# Altium PCB ApDet.PcbDoc
Units mm, origin at the board's own origin, x right, y up, seen from the top; angles counter-clockwise.
Board outline 58 x 58 mm, 2 copper layers (Top Layer, Bottom Layer); 24 components, 31 nets, 196 pads, 34 vias.
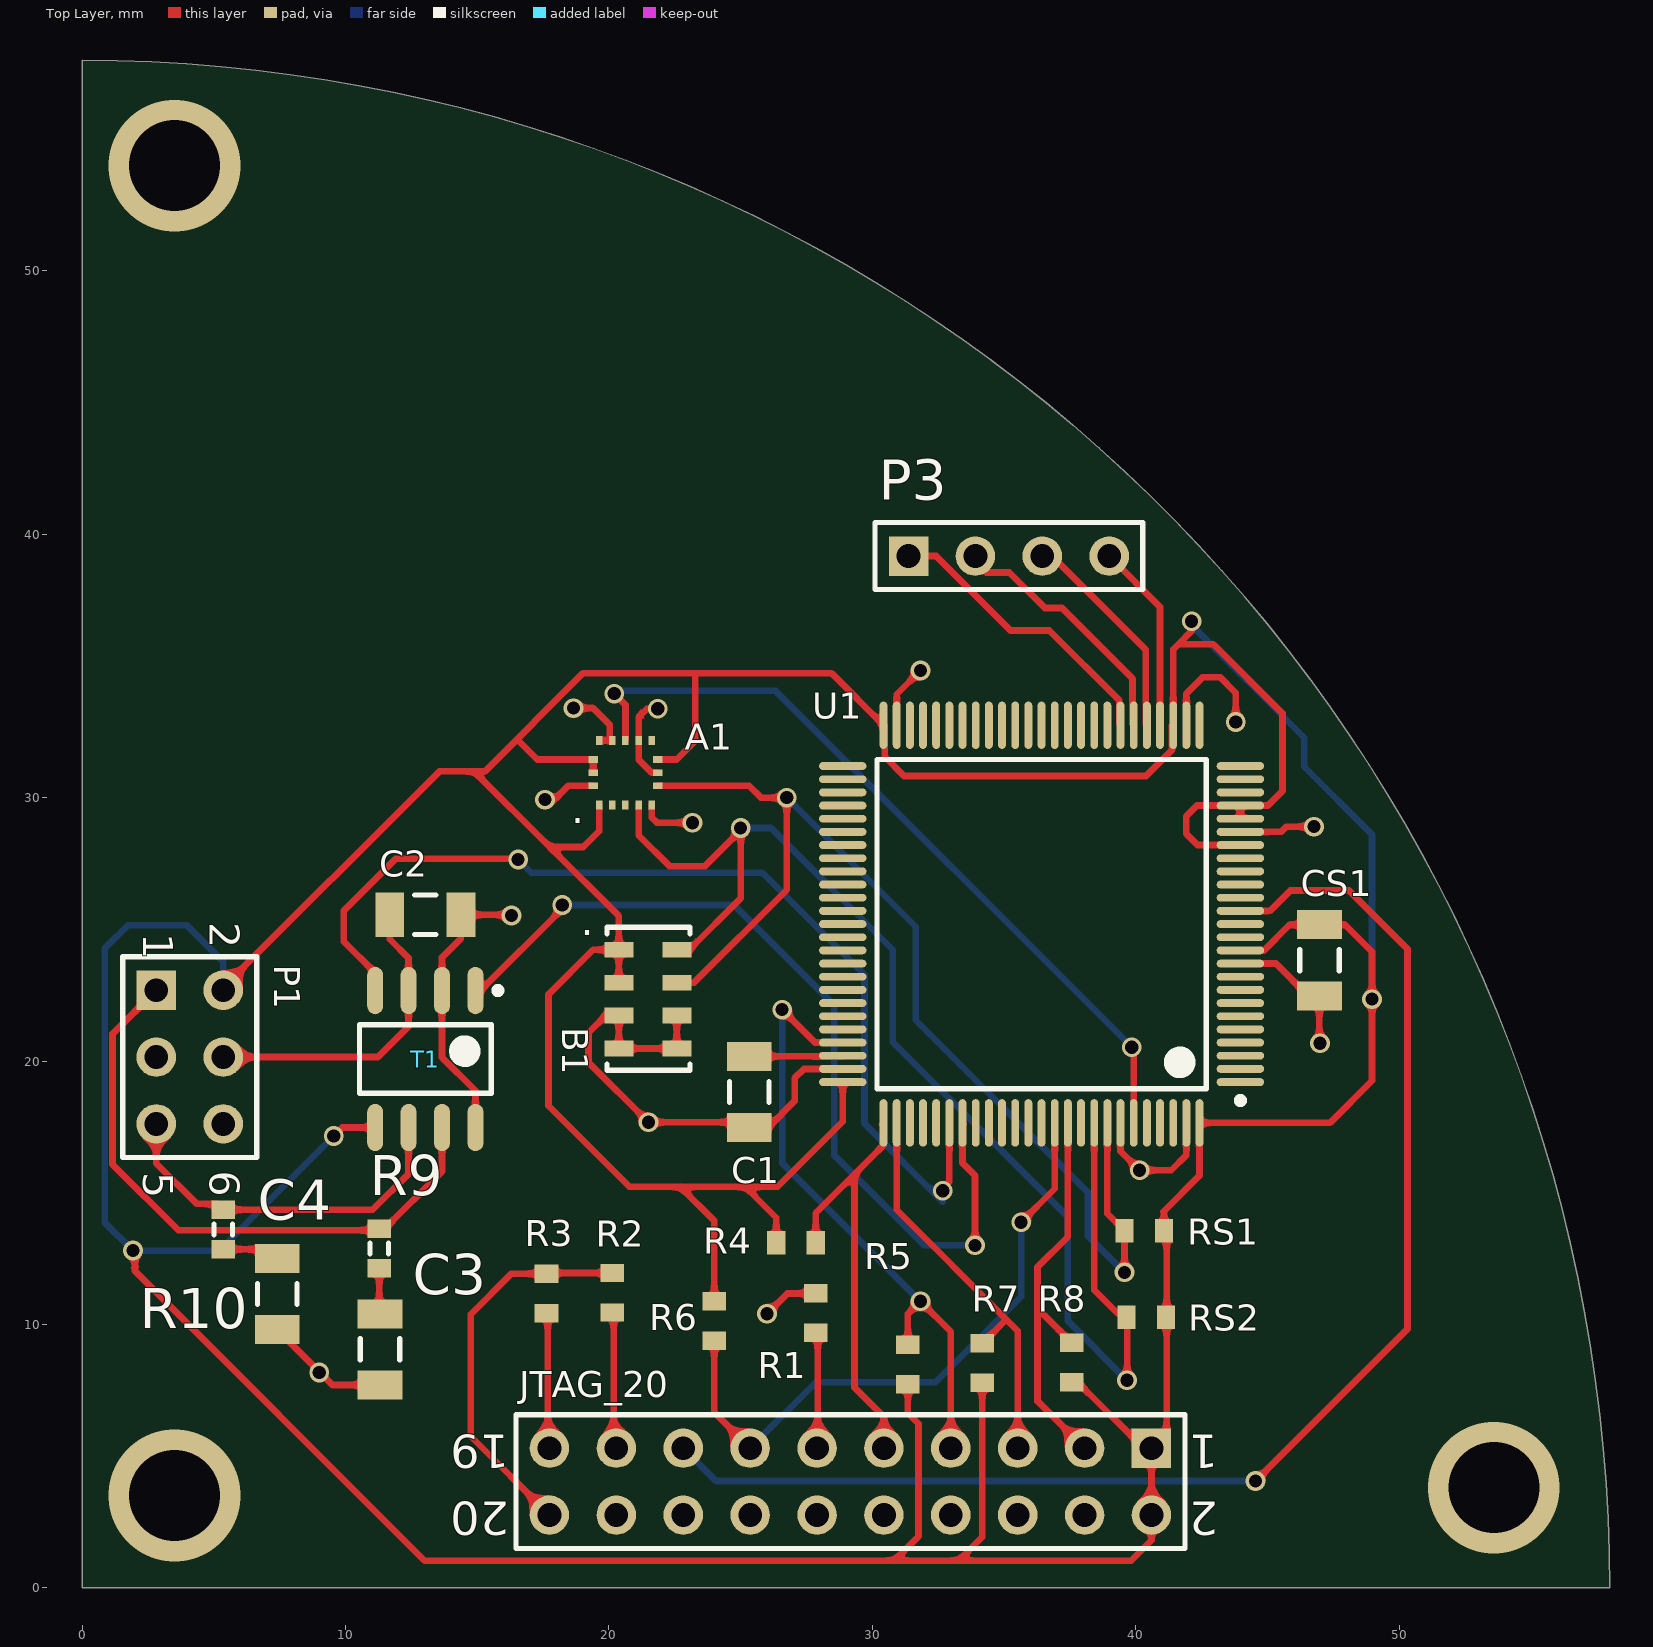
[diagram p0: Top Layer view]
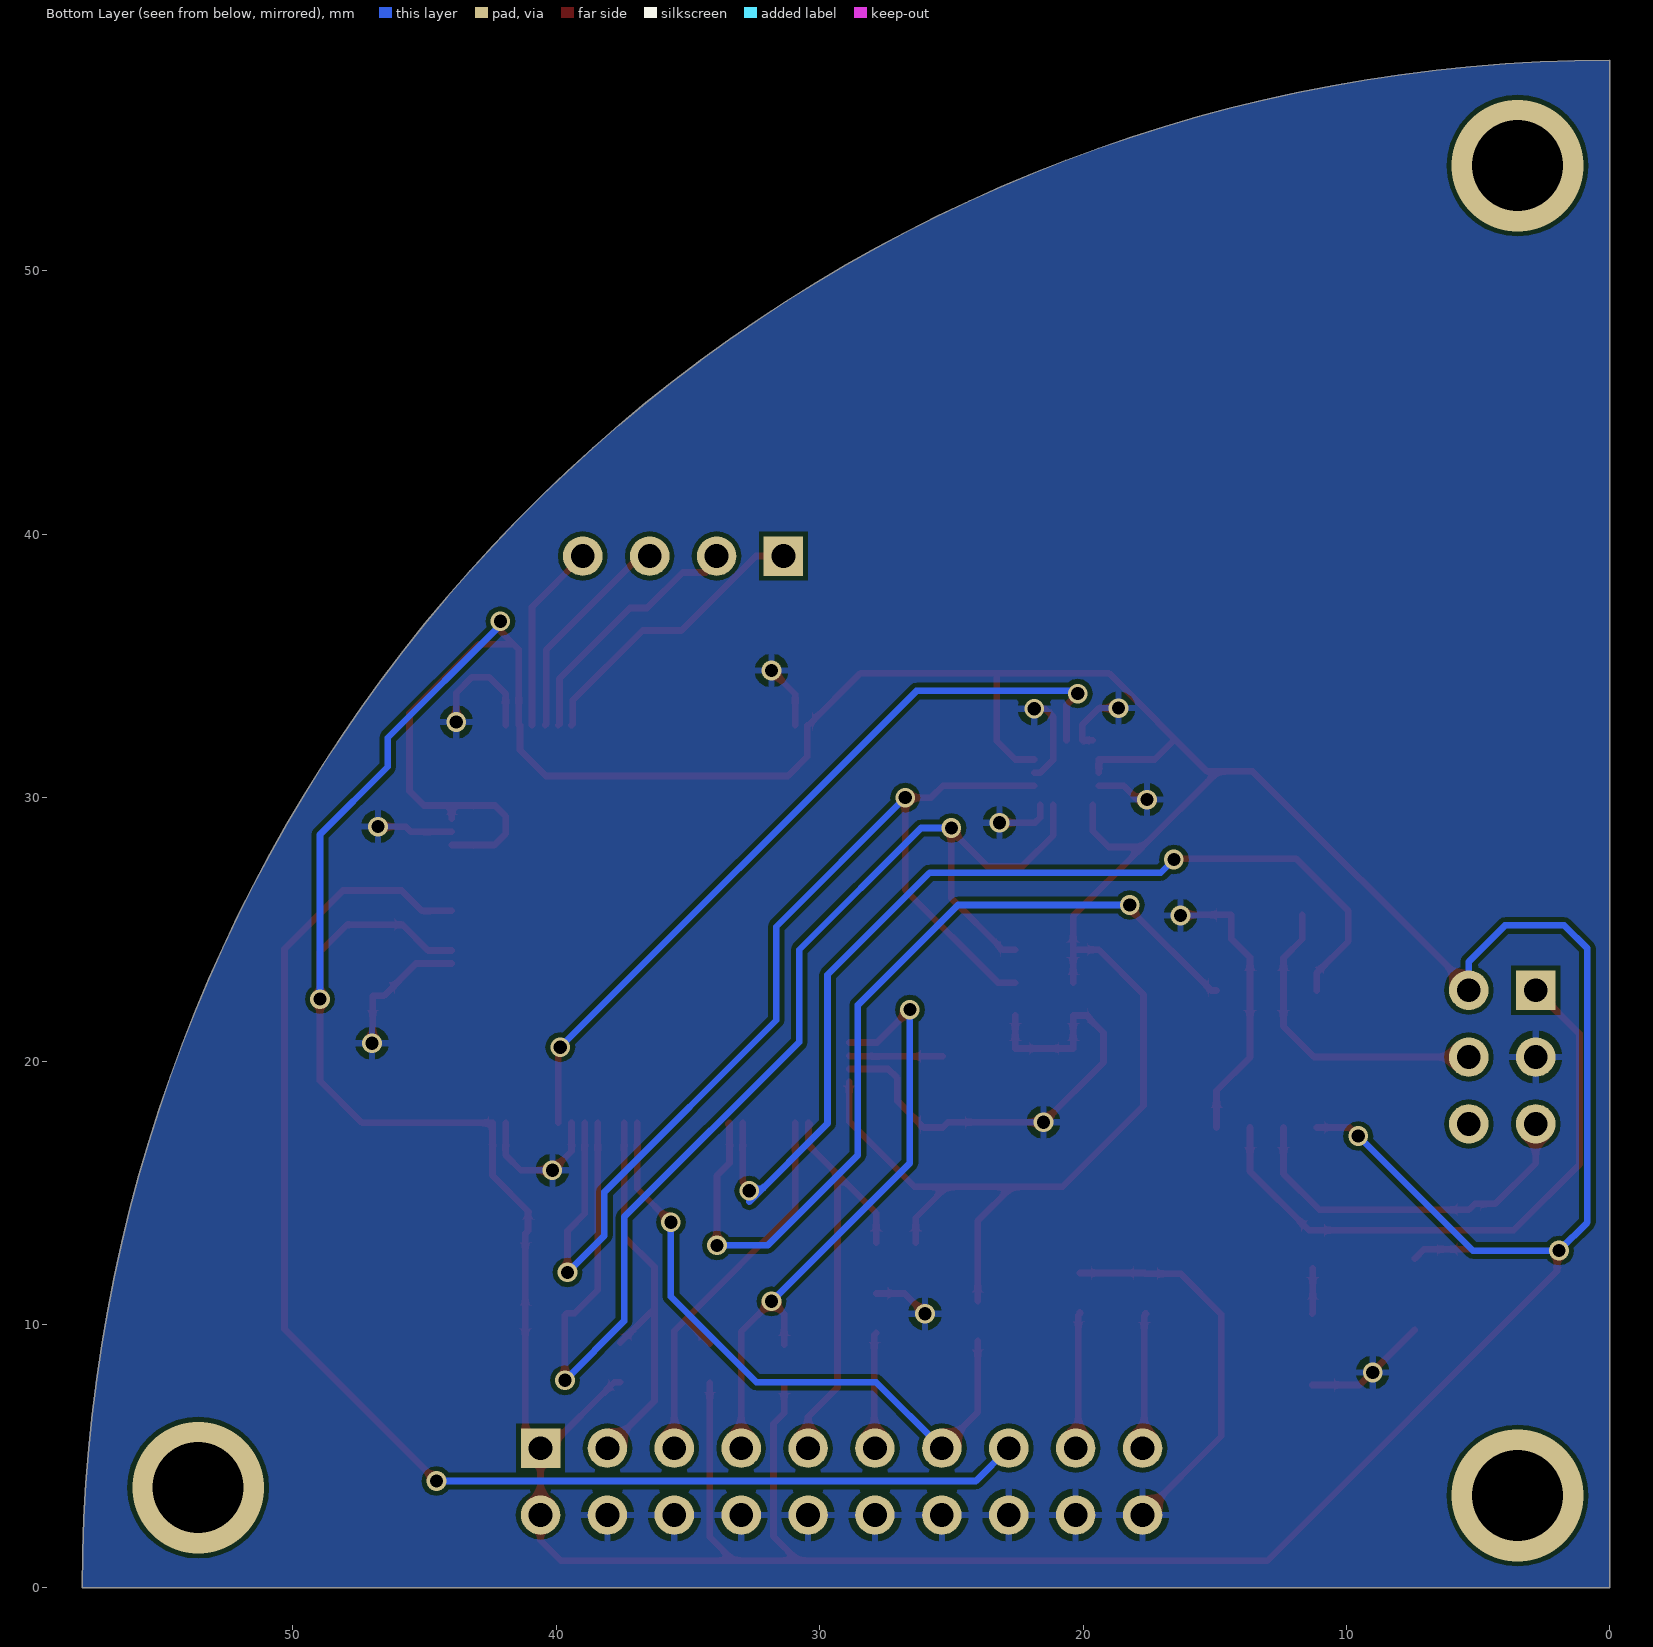
[diagram p1: Bottom Layer view, seen from below]

## Layer stack, top to bottom
Top Solder: solder mask 0.0102, Solder Resist, Dk 3.5
Top Layer: signal copper 0.0356
Dielectric 1: dielectric 0.32, FR-4, Dk 4.8
Bottom Layer: signal copper 0.0356
Bottom Solder: solder mask 0.0102, Solder Resist, Dk 3.5

## Board outline
0,58 cw(c0,0) 58,0 0,0

## Design rules (kind name [scope] priority, off if disabled: settings)
Clearance [All] p1: gap=0.178
HoleSize [All] p1: absolutevalues=TRUE maxlimit=5.08 minlimit=0.025 maxpercent=80.000 minpercent=20.000
HoleToHoleClearance [All] p1: gap=0.178 allowstackedmicrovias=TRUE
MinimumSolderMaskSliver [All] p1: minsoldermaskwidth=0.025
PolygonConnect [All] p1: connectstyle=Relief reliefconductorwidth=0.254 reliefentries=4 polygonreliefangle="90 Angle" airgapwidth=0.254
RoomDefinition apogee_detection_board [InComponentClass('apogee_detection_board')] p1: confinementstyle=ConfineIn formatcopy=TRUE lockcomponents=FALSE outline 59.133,1.403 85.284,1.403 85.284,14.629 59.133,14.629
RoomDefinition Sensors [InComponentClass('Sensors')] p2: confinementstyle=ConfineIn formatcopy=TRUE lockcomponents=FALSE outline -99.05,-67.325 -48.25,-67.325 -48.25,-41.925 -99.05,-41.925
RoutingVias [All] p1: holewidth=0.5 width=0.75 viastyle="Through Hole" minholewidth=0.5 minwidth=0.75 maxholewidth=0.711 maxwidth=1.27
SilkToSilkClearance [All] p1: silktosilkclearance=0.178
SilkToSolderMaskClearance [IsPad] p1: minsilkscreentomaskgap=0.076 clearancetoexposedcopper=TRUE
SolderMaskExpansion [All] p1: expansion=0.102
Width [All] p1: maxlimit=0.254 minlimit=0.254 preferedwidth=0.254
25 further rules are at their usual default settings.

## Classes and differential pairs
component class apogee_detection_board: C1 C2 C3 C4 JTAG_20 P1 P3 R1 R2 R3 R4 R5 R6 R7 R8 R9 R10 T1
component class Sensors: A1 B1 CS1 RS1 RS2

## Components (designator, comment, footprint, x,y, rotation, side; value= is the part's Value field where it differs from the comment)
A1 "LIS331HH Accelerometer" LGA16 19.625,29.725 r90 top
B1 "MS5607-02BA Barometer" "Barometer LCC" 20.875,24.225 r270 top
C1 "Cap Semi" C1206 25.325,18.825 r270 top
C2 "Cap Semi" C1206 13.025,25.55 r180 top
C3 "Cap Semi" C1206 11.3,9.05 r90 top
C4 "Cap Semi" C1206 7.4,11.15 r90 top
CS1 "Cap Semi" C1206 46.975,23.825 r90 top
JTAG_20 "JTAG-20" PCBComponent_1 40.6,5.3 r180 top
P1 "Header 3X2" HDR2X3 2.81,22.69 r270 top
P3 "Header 4" HDR1X4 31.375,39.175 r0 top
R1 "RTCK PD" J1-0603 27.85,10.425 r270 top
R2 "DBGRQ PD" J1-0603 20.125,11.2 r270 top
R3 "DBGACK PD" J1-0603 17.625,11.175 r270 top
R4 "RTCK PD" J1-0603 27.1,13.1 r180 top
R5 "RTCK PD" J1-0603 31.35,8.475 r270 top
R6 "RTCK PD" J1-0603 24,10.125 r90 top
R7 "RTCK PD" J1-0603 34.175,8.525 r270 top
R8 "RTCK PD" J1-0603 37.575,8.55 r270 top
R9 "DBGACK PD" J1-0603 11.275,12.875 r90 top
R10 "DBGACK PD" J1-0603 5.35,13.6 r90 top
RS1 "Res3" J1-0603 40.325,13.55 r0 top
RS2 "Res3" J1-0603 40.4,10.275 r0 top
T1 "TLE8250GVIO" INF-PG-DSO-8-16_N 13.025,20.075 r270 top
U1 "STM32F417VET6" STM-LQFP100_N 36.425,25.2 r180 top

## Footprints (in the part's own frame and the unit in brackets; to place one, negate y for a bottom-side part, rotate by r counter-clockwise, add the part's x,y. Pads: shape width x height; smd on the part's side, far side on the other; paste and mask are expansions set on the pad)
"Barometer LCC" [mm]
  rect 0.6x1.1 smd: 1(0,-0.5) 2(1.25,-0.5) 3(2.5,-0.5) 4(3.75,-0.5) 5(3.75,1.7) 6(2.5,1.7) 7(1.25,1.7) 8(0,1.7)
  silkscreen extent -0.85,-0.95 4.58,2.2
C1206 [mm] "Chip Capacitor, Body 3.2x1.6mm, IPC High Density"
  rect 1.1x1.7 smd: 1(-1.35,0) 2(1.35,0)
  silkscreen extent -0.4,-0.75 0.4,0.75, body extent -1.7,-0.9 1.7,0.9, height 1.3
HDR1X4 [mm] "Connector; Header; 4 Position"
  rect 1.5x1.5 hole 0.9: 1(0,0)
  round 1.5 hole 0.9: 2(2.54,0) 3(5.08,0) 4(7.62,0)
  silkscreen extent -1.27,-1.27 8.89,1.27
HDR2X3 [mm] "Connector; Header; 3x2 Position"
  rect 1.5x1.5 hole 0.9: 1(0,0)
  round 1.5 hole 0.9: 2(0,2.54) 3(2.54,0) 4(2.54,2.54) 5(5.08,0) 6(5.08,2.54)
  silkscreen extent -1.27,-1.27 6.35,3.81
INF-PG-DSO-8-16_N [mm] "SOP, 8-Leads, Body 4.9x3.9mm, Pitch 1.27mm, IPC Medium Density"
  oval 1.8x0.6 smd: 1(-2.6,1.905) 2(-2.6,0.635) 3(-2.6,-0.635) 4(-2.6,-1.905) 5(2.6,-1.905) 6(2.6,-0.635) 7(2.6,0.635) 8(2.6,1.905)
  silkscreen extent -2.72,-2.5 1.3,2.88, body extent -2,-2.5 2,2.5, height 1.75
J1-0603 [mm] "Chip Resistor, Body 1.6x0.8mm, IPC High Density"
  rect 0.7x0.9 smd: 1(-0.75,0) 2(0.75,0)
  body extent -0.85,-0.48 0.85,0.48, height 0.9
LGA16 [mm]
  rect 0.35x0.25 smd: 1(0,0) 2(0,-0.5) 3(0,-1) 4(0,-1.5) 5(0,-2) 9(2.45,-2) 10(2.45,-1.5) 11(2.45,-1) 12(2.45,-0.5) 13(2.45,0)
  rect 0.25x0.35 smd: 6(0.725,-2.225) 7(1.225,-2.225) 8(1.725,-2.225) 14(1.725,0.225) 15(1.225,0.225) 16(0.725,0.225)
PCBComponent_1 [mm]
  rect 1.5x1.5 hole 0.9: 1(0,0)
  round 1.5 hole 0.9: 2(0,2.54) 3(2.54,0) 4(2.54,2.54) 5(5.08,0) 6(5.08,2.54) 7(7.62,0) 8(7.62,2.54) 9(10.16,0) 10(10.16,2.54) 11(12.7,0) 12(12.7,2.54) 13(15.24,0) 14(15.24,2.54) 15(17.78,0) 16(17.78,2.54) 17(20.32,0) 18(20.32,2.54) 19(22.86,0) 20(22.86,2.54)
  silkscreen extent -1.27,-1.27 24.13,3.81
STM-LQFP100_N [mm] "Thin QFP, 100-Leads, Body 14x14mm, Pitch 0.5mm, IPC Medium Density"
  oval 1.8x0.3 smd: 1(-7.55,6) 2(-7.55,5.5) 3(-7.55,5) 4(-7.55,4.5) 5(-7.55,4) 6(-7.55,3.5) 7(-7.55,3) 8(-7.55,2.5) 9(-7.55,2) 10(-7.55,1.5) 11(-7.55,1) 12(-7.55,0.5) 13(-7.55,0) 14(-7.55,-0.5) 15(-7.55,-1) 16(-7.55,-1.5) 17(-7.55,-2) 18(-7.55,-2.5) 19(-7.55,-3) 20(-7.55,-3.5) 21(-7.55,-4) 22(-7.55,-4.5) 23(-7.55,-5) 24(-7.55,-5.5) 25(-7.55,-6) 51(7.55,-6) 52(7.55,-5.5) 53(7.55,-5) 54(7.55,-4.5) 55(7.55,-4) 56(7.55,-3.5) 57(7.55,-3) 58(7.55,-2.5) 59(7.55,-2) 60(7.55,-1.5) 61(7.55,-1) 62(7.55,-0.5) 63(7.55,0) 64(7.55,0.5) 65(7.55,1) 66(7.55,1.5) 67(7.55,2) 68(7.55,2.5) 69(7.55,3) 70(7.55,3.5) 71(7.55,4) 72(7.55,4.5) 73(7.55,5) 74(7.55,5.5) 75(7.55,6)
  oval 0.3x1.8 smd: 26(-6,-7.55) 27(-5.5,-7.55) 28(-5,-7.55) 29(-4.5,-7.55) 30(-4,-7.55) 31(-3.5,-7.55) 32(-3,-7.55) 33(-2.5,-7.55) 34(-2,-7.55) 35(-1.5,-7.55) 36(-1,-7.55) 37(-0.5,-7.55) 38(0,-7.55) 39(0.5,-7.55) 40(1,-7.55) 41(1.5,-7.55) 42(2,-7.55) 43(2.5,-7.55) 44(3,-7.55) 45(3.5,-7.55) 46(4,-7.55) 47(4.5,-7.55) 48(5,-7.55) 49(5.5,-7.55) 50(6,-7.55) 76(6,7.55) 77(5.5,7.55) 78(5,7.55) 79(4.5,7.55) 80(4,7.55) 81(3.5,7.55) 82(3,7.55) 83(2.5,7.55) 84(2,7.55) 85(1.5,7.55) 86(1,7.55) 87(0.5,7.55) 88(0,7.55) 89(-0.5,7.55) 90(-1,7.55) 91(-1.5,7.55) 92(-2,7.55) 93(-2.5,7.55) 94(-3,7.55) 95(-3.5,7.55) 96(-4,7.55) 97(-4.5,7.55) 98(-5,7.55) 99(-5.5,7.55) 100(-6,7.55)
  silkscreen extent -7.68,-6.25 6.25,6.82, body extent -7,-7 7,7, height 1.6

## Part data
C1 C2 C3 C4 CS1: "Capacitor (Semiconductor SIM Model)"
JTAG_20: library part "HEADER 10X2", "20-pin JTAG header"
P1: "Header, 3-Pin, Dual row"
P3: "Header, 4-Pin"
R1 R2 R3 R4 R5 R6 R7 R8 R9 R10: library part Res3, "Resistor"
RS1 RS2: "Resistor"
T1: "High Speed CAN-Transceiver, 1 Mbit/s Transmission Rate, PG-DSO-8-16, Reel, Green"
U1: "ARM Cortex-M4 32-bit MCU+FPU, 210 DMIPS, 512 kB Flash, 192 kB Internal RAM, 82 I/Os, 100-pin LQFP, -40 to 85 degC, Tray"

## Via types
v1: diameter 0.75, hole 0.5, Top Layer to Bottom Layer, 31 vias
v2: diameter 5, hole 3.45, Top Layer to Bottom Layer, 3 vias

## Nets (pads, with @x,y where several pads share a name; then routed paths per layer and width w, separated by ;. In a path a pad name is that pad's centre, name@x,y a point inside that pad or via, vN(x,y) a via of type N, cw(c..) or ccw(c..) an arc to the next point about the centre after c; other vN are vias at no path point)
3.3V: A1.1 A1.8 A1.14 A1.15 B1.1 B1.2 CS1.2 JTAG_20.1 JTAG_20.2 P1.2 R4.2 R5.2 R6.2 R7.2 R8.2 RS1.2 RS2.2 T1.5 U1.11 U1.19 U1.21 U1.22 U1.28 U1.50 U1.75 U1.100 | length 260.1
  Top Layer w0.254: v1(1.925,12.8) 2,12.725 2,12.025 13,1.025 30.825,1.025 ; P1.2 5.35,22.786 13.564,31 14.875,31 ; v1(9.55,17.15) 9.875,17.475 T1.5 ; 16.525,32.2 17.275,31.45 A1.14 A1.15 ; A1.1 19.625,28.725 19.025,28.125 17.75,28.125 ; B1.2 B1.1 ; A1.8 22.575,31.45 23.275,32.15 23.275,34.68 23.225,34.73 ; R6.2 24,13.925 22.7,15.225 ; R4.2 26.35,14.05 25.175,15.225 ; U1.75 28.875,17.7 26.4,15.225 25.175,15.225 ; R5.2 31.35,6.625 31.75,6.225 31.75,1.95 30.825,1.025 ; R7.2 34.175,1.925 33.275,1.025 ; R8.2 37.8,7.8 40.3,5.3 JTAG_20.1 ; v1(42.125,36.7) 42.125,36.325 41.625,35.825 ; U1.11 44.868,24.2 45.843,25.175 CS1.2 47.95,25.175 48.975,24.15 v1(48.975,22.35) 48.975,19.25 47.375,17.65 U1.100 42.425,15.65 41.05,14.275 41.075,14.25 RS1.2 41.15,13.475 41.175,13.45 41.175,5.875 JTAG_20.1 ; U1.19 42.35,28.2 41.925,28.625 41.925,29.3 42.325,29.7 U1.22 ; U1.21 U1.22 ; 14.875,31 15.289,31 19.018,34.73 23.225,34.73 ; 14.875,31 17.75,28.125 ; 17.75,28.125 20.375,25.5 B1.1 ; B1.1 19.4,24.225 17.7,22.525 17.7,18.3 20.775,15.225 22.7,15.225 ; 22.7,15.225 25.175,15.225 ; 23.225,34.73 28.445,34.73 U1.50 30.47,32.75 30.47,31.563 31.208,30.825 40.393,30.825 41.38,31.812 41.38,32.75 U1.28 41.425,35.625 41.625,35.825 ; 30.825,1.025 33.275,1.025 ; 33.275,1.025 39.825,1.025 40.6,1.8 JTAG_20.2 JTAG_20.1 ; 41.625,35.825 42.95,35.825 45.575,33.2 45.575,30.25 45.025,29.7 U1.22
  Bottom Layer w0.254: P1.2 5.35,23.775 3.975,25.15 1.725,25.15 0.85,24.275 0.85,13.875 v1(1.925,12.8) 5.2,12.8 v1(9.55,17.15) ; v1(42.125,36.7) 42.125,36.55 46.4,32.275 46.4,31.175 48.975,28.6 v1(48.975,22.35)
5V: C2.2 P1.4 T1.3 | length 12.1
  Top Layer w0.254: P1.4 11.225,20.15 12.39,21.315 T1.3 12.39,23.91 11.675,24.625 C2.2
24V: P1.6
CANH: P1.1 R9.2 T1.7 | length 23.4
  Top Layer w0.254: P1.1 1.15,21.03 1.15,16.075 3.65,13.575 11.425,13.575 13.66,15.81 T1.7
CANL: P1.5 R10.2 T1.6 | length 14.1
  Top Layer w0.254: P1.5 2.81,16.115 4.35,14.575 5.125,14.575 R10.2 11.025,14.35 12.39,15.715 T1.6
CLK: P3.3 U1.30 | length 8.3
  Top Layer w0.254: P3.3 36.825,39.175 40.38,35.62 40.38,32.795 U1.30
CS: P3.4 U1.29 | length 7.2
  Top Layer w0.254: P3.4 40.925,37.245 U1.29
GND: A1.5 A1.7 A1.10 A1.12 A1.13 A1.16 B1.3 B1.4 B1.5 B1.6 C1.2 C2.1 C3.1 C4.1 CS1.1 JTAG_20.4 JTAG_20.6 JTAG_20.8 JTAG_20.10 JTAG_20.12 JTAG_20.14 JTAG_20.16 JTAG_20.18 JTAG_20.20 P1.3 R1.1 R2.1 R3.1 T1.2 T1.8 U1.10 U1.20 U1.27 U1.49 U1.74 U1.94 U1.99 | length 82.9
  Top Layer w0.254: C4.1 9.5,7.7 C3.1 ; T1.8 14.93,18.87 13.66,20.14 T1.2 13.66,23.935 14.375,24.65 C2.1 16.275,25.55 v1(16.3,25.525) ; v1(17.575,29.925) 17.925,29.925 18.45,30.45 A1.16 ; JTAG_20.20 14.75,5.75 14.75,10.375 16.3,11.925 R3.1 17.65,11.95 R2.1 ; v1(18.65,33.4) 19.4,33.4 20.026,32.774 20.026,32.175 A1.13 ; A1.5 21.625,29.25 21.825,29.05 v1(23.175,29.05) ; A1.7 21.619,30.95 21.125,31.444 A1.10 21.125,33.055 21.445,33.375 v1(21.85,33.375) ; B1.6 B1.5 B1.4 B1.3 19.875,21.725 19.225,21.075 19.225,19.95 v1(21.5,17.675) 25.125,17.675 C1.2 26.05,17.475 27.05,18.475 27.05,19.35 27.4,19.7 U1.74 ; v1(26,10.4) 26.775,11.175 R1.1 ; U1.49 30.925,33.925 v1(31.825,34.825) ; U1.94 39.425,16.575 v1(40.15,15.85) 41.35,15.85 41.925,16.425 U1.99 ; U1.27 41.925,33.95 42.55,34.575 43.2,34.575 43.8,33.975 v1(43.8,32.875) ; U1.10 45.325,23.7 46.55,22.475 CS1.1 46.975,20.7 v1(47,20.675) ; U1.20 45.525,28.7 45.725,28.9 v1(46.775,28.9)
  other v1: 9,8.175
MISO: P3.2 U1.31 | length 9.8
  Top Layer w0.254: P3.2 33.915,38.96 34.325,38.55 35.2,38.55 36.55,37.2 37.2,37.2 39.88,34.52 39.88,32.795 U1.31
MOSI: P3.1 U1.32 | length 11.2
  Top Layer w0.254: P3.1 32.423,39.175 35.248,36.35 36.718,36.35 39.38,33.688 39.38,32.795 U1.32
NetA1_11: A1.11 U1.95 | length 30.2
  Top Layer w0.254: v1(20.2,33.95) 20.625,33.525 A1.11 ; v1(39.85,20.525) 39.925,20.45 U1.95
  Bottom Layer w0.254: v1(20.2,33.95) 20.305,34.055 26.32,34.055 v1(39.85,20.525)
NetC1_1: C1.1 U1.73 | length 3.6
  Top Layer w0.254: C1.1 28.85,20.175 U1.73
NetC3_2: C3.2 R9.1 | length 1.7
  Top Layer w0.254: R9.1 11.275,10.425 C3.2
NetC4_2: C4.2 R10.1 | length 2.2
  Top Layer w0.254: R10.1 7.05,12.85 C4.2
NetIC1_2: 
NetIC1_4: 
NetIC1_6: 
NetIC1_10: 
NetJTAG_20_3: JTAG_20.3 R8.1 U1.90 | length 15.4
  Top Layer w0.254: U1.90 37.425,13.325 36.275,12.175 36.275,10.475 ; R8.1 36.4,10.475 36.275,10.475 ; JTAG_20.3 36.275,7.085 36.275,10.475
NetJTAG_20_5: JTAG_20.5 R7.1 U1.77 | length 15.6
  Top Layer w0.254: U1.77 30.925,14.35 35.1,10.175 ; R7.1 35.075,10.175 35.1,10.175 ; JTAG_20.5 35.52,9.755 35.1,10.175
NetJTAG_20_7: JTAG_20.7 R5.1 U1.72 | length 24
  Top Layer w0.254: v1(26.575,21.95) 27.825,20.7 U1.72 ; R5.1 31.35,10.4 v1(31.825,10.875) 32.98,9.72 JTAG_20.7
  Bottom Layer w0.254: v1(26.575,21.95) 26.575,16.125 v1(31.825,10.875)
NetJTAG_20_9: JTAG_20.9 R4.1 U1.76 | length 16.6
  Top Layer w0.254: R4.1 27.85,14.225 29.325,15.7 ; U1.76@30.365,17.59 U1.76 30.425,16.8 29.325,15.7 ; JTAG_20.9 30.44,6.485 29.325,7.6 29.325,15.7
NetJTAG_20_11: JTAG_20.11 R1.2 | length 4.4
  Top Layer w0.254: R1.2 27.925,9.6 27.925,5.325 JTAG_20.11
NetJTAG_20_13: JTAG_20.13 R6.1 U1.89 | length 24.4
  Top Layer w0.254: R6.1 24,6.66 JTAG_20.13 ; v1(35.65,13.875) 36.925,15.15 U1.89
  Bottom Layer w0.254: JTAG_20.13 27.86,7.8 32.4,7.8 35.65,11.05 v1(35.65,13.875)
NetJTAG_20_15: JTAG_20.15 U1.14 | length 52.4
  Top Layer w0.254: U1.14 45.1,25.7 45.875,26.475 48.1,26.475 50.325,24.25 50.325,9.825 v1(44.55,4.05)
  Bottom Layer w0.254: JTAG_20.15 24.07,4.05 v1(44.55,4.05)
NetJTAG_20_17: JTAG_20.17 R2.2 | length 5.2
  Top Layer w0.254: R2.2 20.1,10.425 20.175,10.35 20.175,5.405 JTAG_20.17
NetJTAG_20_19: JTAG_20.19 R3.2 | length 5.2
  Top Layer w0.254: R3.2 17.6,10.4 17.675,10.325 17.675,5.365 JTAG_20.19
NetT1_1: T1.1 U1.82 | length 34
  Top Layer w0.254: T1.1 15.125,22.675 18.225,25.775 v1(18.225,25.925) ; U1.82@33.47,17.605 U1.82 33.425,16.125 33.9,15.65 v1(33.9,13)
  Bottom Layer w0.254: v1(18.225,25.925) 24.75,25.925 28.55,22.125 28.55,16.425 31.975,13 v1(33.9,13)
NetT1_4: T1.4 U1.81 | length 39
  Top Layer w0.254: T1.4 11.12,23.355 9.925,24.55 9.925,25.7 11.9,27.675 16.525,27.675 v1(16.55,27.65) ; v1(32.675,15.075) 32.625,15.075 32.6,15.1 32.625,15.125 32.925,15.425 U1.81
  Bottom Layer w0.254: v1(16.55,27.65) 17.05,27.15 25.825,27.15 29.7,23.275 29.7,17.625 32.675,14.65 v1(32.675,15.075)
SCL: A1.4 B1.8 RS2.1 U1.92 | length 50.1
  Top Layer w0.254: A1.4 21.125,28.575 22.3,27.4 23.65,27.4 25,28.75 25,26.175 23.05,24.225 B1.8 ; U1.92 38.425,11.3 39.3,10.425 39.6,10.425 39.675,10.35 v1(39.675,7.875)
  Bottom Layer w0.254: v1(25,28.85) 26.15,28.85 30.775,24.225 30.775,20.725 37.425,14.075 37.425,10.125 v1(39.675,7.875)
SDA: A1.6 B1.7 RS1.1 U1.93 | length 43.5
  Top Layer w0.254: A1.6 25.325,30.45 25.775,30 v1(26.75,30) 26.75,26.5 23.225,22.975 B1.7 ; U1.93 38.925,14.2 RS1.1 v1(39.575,11.975)
  Bottom Layer w0.254: v1(26.75,30) 31.65,25.1 31.65,21.55 38.175,15.025 38.175,13.375 v1(39.575,11.975)
pads on no net: A1.2 A1.3 A1.9 U1.1 U1.2 U1.3 U1.4 U1.5 U1.6 U1.7 U1.8 U1.9 U1.12 U1.13 U1.15 U1.16 U1.17 U1.18 U1.23 U1.24 U1.25 U1.26 U1.33 U1.34 U1.35 U1.36 U1.37 U1.38 U1.39 U1.40 U1.41 U1.42 U1.43 U1.44 U1.45 U1.46 U1.47 U1.48 U1.51 U1.52 U1.53 U1.54 U1.55 U1.56 U1.57 U1.58 U1.59 U1.60 U1.61 U1.62 U1.63 U1.64 U1.65 U1.66 U1.67 U1.68 U1.69 U1.70 U1.71 U1.78 U1.79 U1.80 U1.83 U1.84 U1.85 U1.86 U1.87 U1.88 U1.91 U1.96 U1.97 U1.98
copper on no net: | length 0.1
  Top Layer w0: v2@54.95,3.15 v2@55.05,3.25
  other v2: 3.5,3.5 53.6,3.8 3.5,54

## Polygon pours and split planes (outlines as drawn)
GND on Bottom Layer "Top Layer-No Net" (solid, pour order 0): 0,58 cw(c0,0) 58,0 0,0

## Silkscreen, mask and mechanical layers (free items; w line width, h text height)
Top Overlay:
  text "." at 18.575,29.025 h1.14
  text "." at 18.925,24.775 h1.14
Mechanical 1:
  the board outline again, w0.254

## Text inside footprints (layer, text, board x,y; h text height)
JTAG_20: Top Overlay "20" at 16.216,3.268 h1.27 r180; Top Overlay "19" at 16.216,5.808 h1.27 r180; Top Overlay "1" at 43.14,5.808 h1.27 r180; Top Overlay "2" at 43.14,3.268 h1.27 r180
P1: Top Overlay "6" at 4.835,15.835 h1.14 r270; Top Overlay "5" at 2.31,15.785 h1.14 r270; Top Overlay "2" at 4.835,25.26 h1.14 r270; Top Overlay "1" at 2.31,24.86 h1.14 r270